# Altium PCB HammerHeadAFE.PcbDoc
Units mil, origin at the board's own origin, x right, y up, seen from the top; angles counter-clockwise.
Board outline 850 x 4000 mil, 6 copper layers (Top Layer, GND, SIGNAL1, SIGNAL2, POWER, Bottom Layer); 89 components, 49 nets, 297 pads, 152 vias.
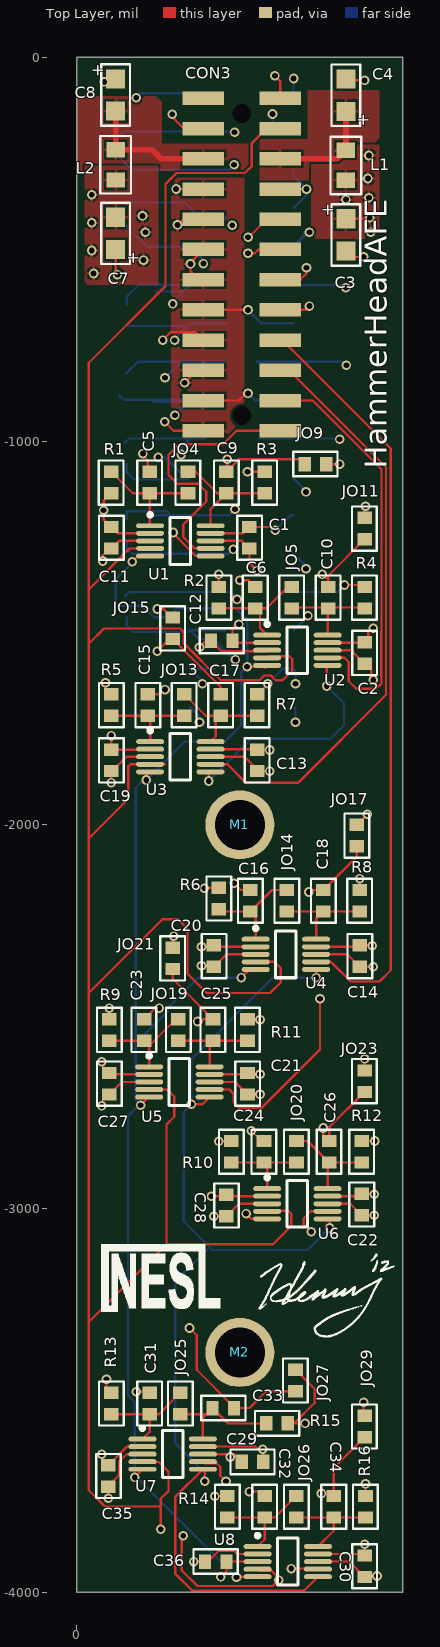
[diagram p0: Top Layer view]
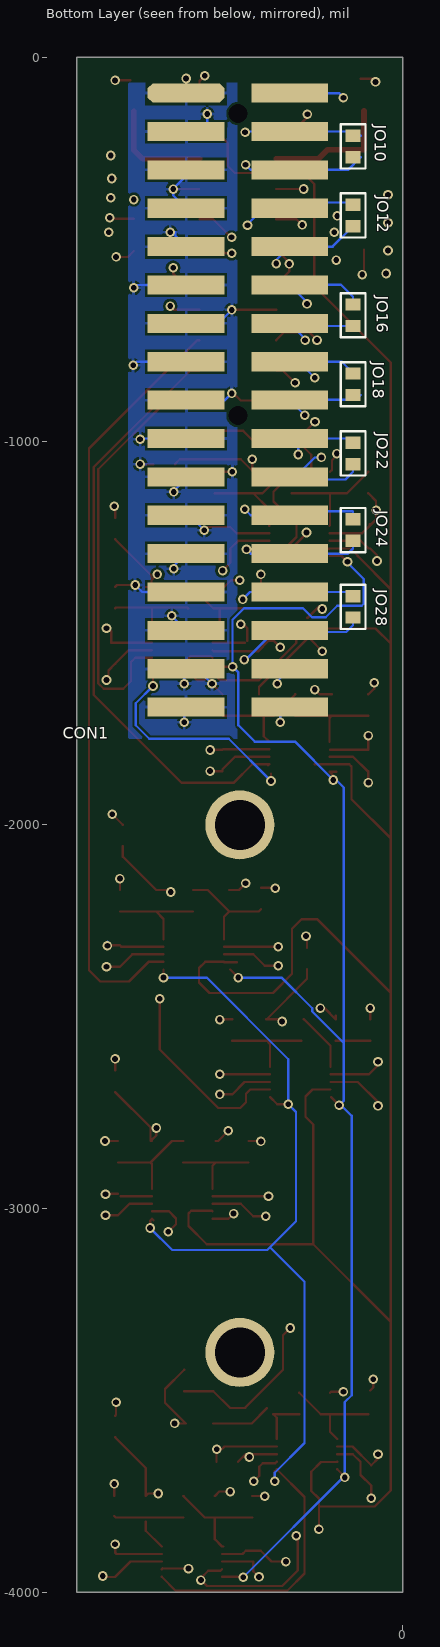
[diagram p1: Bottom Layer view, seen from below]
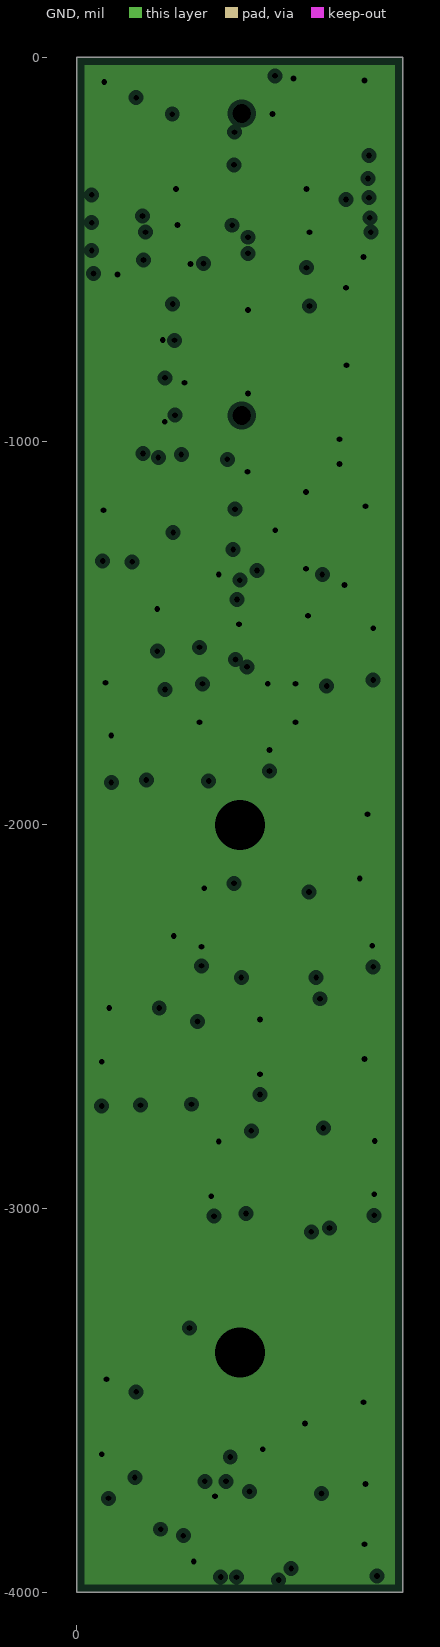
[diagram p2: GND, clearances drawn from the general rule]
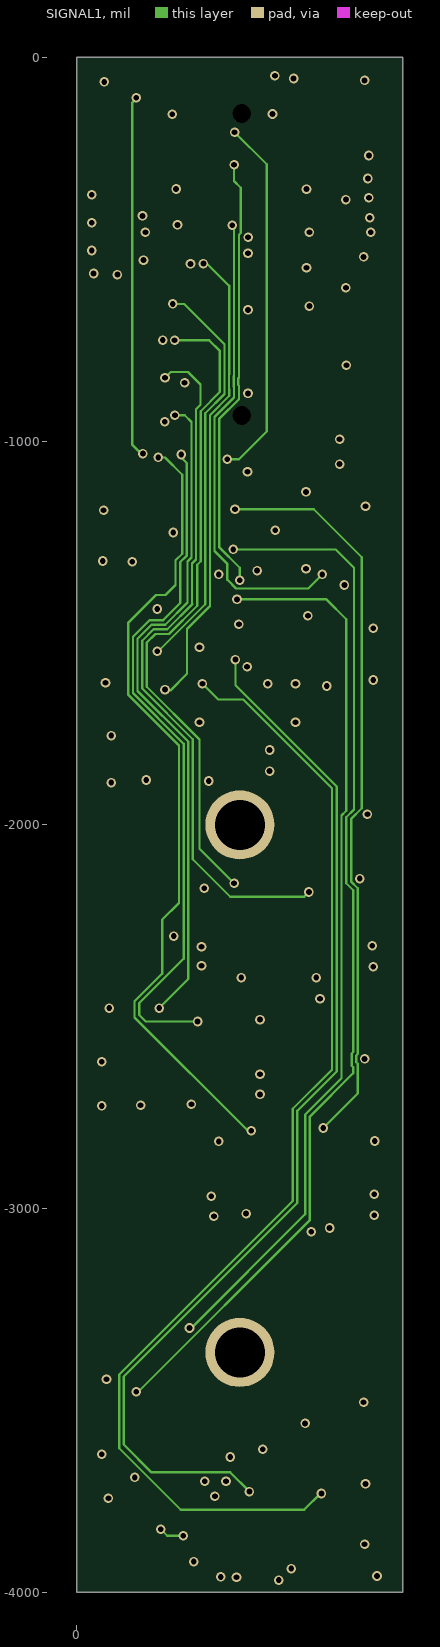
[diagram p3: SIGNAL1]
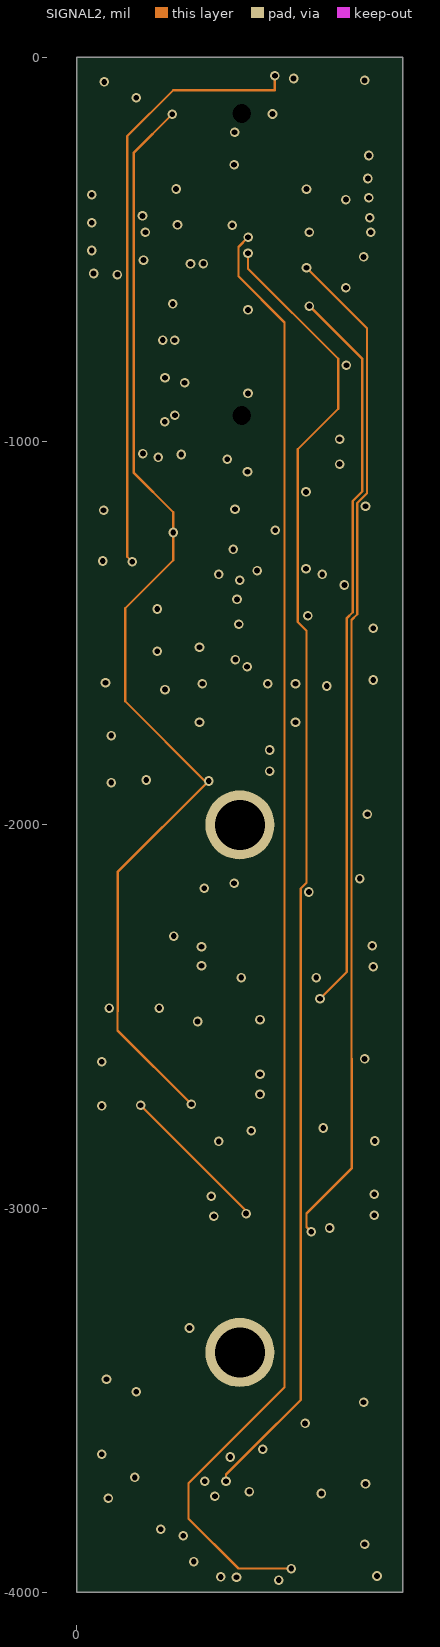
[diagram p4: SIGNAL2]
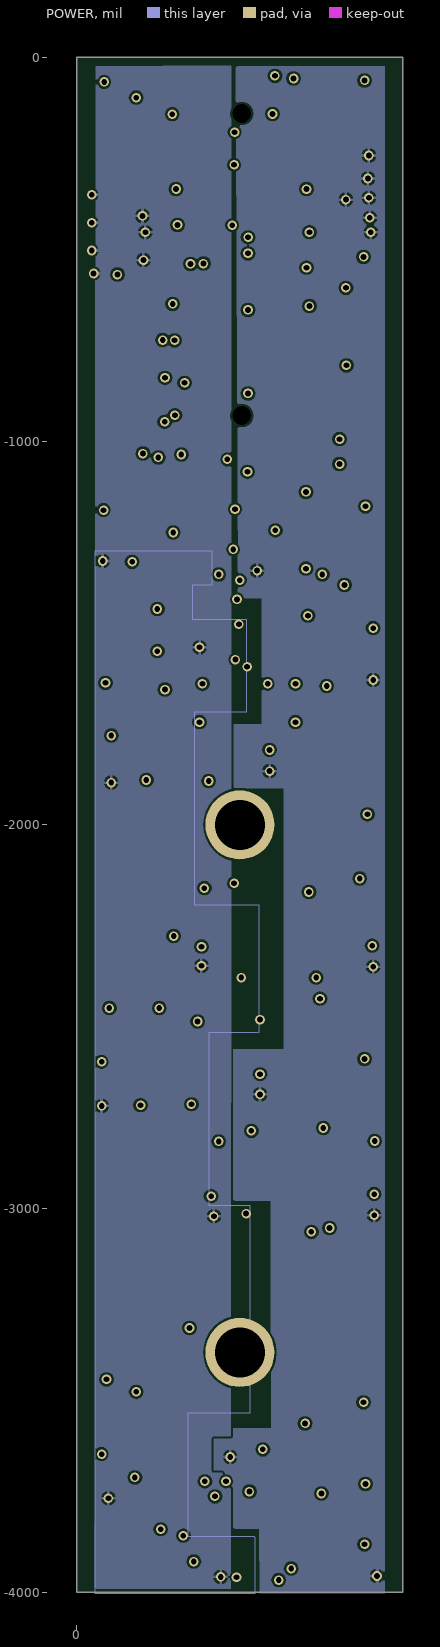
[diagram p5: POWER]

## Layer stack, top to bottom
Top Layer: signal copper 1.4
Dielectric: core 12.6, FR-4, Dk 4.8
GND: plane copper 1.4, net GND
Dielectric: prepreg 12.6, FR-4, Dk 4.8
SIGNAL1: signal copper 1.4
Dielectric: core 12.6, FR-4, Dk 4.8
SIGNAL2: signal copper 1.4
Dielectric: prepreg 12.6, FR-4, Dk 4.8
POWER: signal copper 1.4
Dielectric: core 12.6, FR-4, Dk 4.8
Bottom Layer: signal copper 1.4

## Board outline
0,-4000 0,0 850,0 850,-4000

## Design rules (kind name [scope] priority, off if disabled: settings)
Clearance "Clearance~Sunstone Circuits" [All] p1: gap=6 // Sunstone Circuits Minimum Clearance Rule (MLB~4&6 Layer Designs)
HoleSize "HoleSize~Sunstone Circuits" [All] p1: absolutevalues=TRUE maxlimit=251 minlimit=8 maxpercent=80.000 minpercent=20.000 // Sunstone Circuits Hole Size Rule (MLB~4&6 Layer Designs)
HoleSize Testpoint [All] p2: absolutevalues=TRUE maxlimit=100 minlimit=1 maxpercent=80.000 minpercent=20.000
HoleSize TestPointUsage [All] p3: absolutevalues=TRUE maxlimit=100 minlimit=1 maxpercent=80.000 minpercent=20.000
MinimumAnnularRing "MinimumAnnularRing~Sunstone Circuits" [All] p1: minimumring=7 // Sunstone Circuits Minimum Annular Ring (MLB~4&6 Layer Designs)
PlaneClearance "PlaneClearance~Sunstone Circuits" [All] p1: clearance=12 // Sunstone Circuits Power Plane Clearance Rule (MLB~4&6 Layer Designs)
PlaneConnect "PlaneConnect~Sunstone Circuits" [All] p1: planeconnectstyle=Relief reliefexpansion=10 reliefentries=4 reliefconductorwidth=8 reliefairgap=10 // Sunstone Circuits Power Plane Connect Rule (MLB~4&6 Layer Designs)
PolygonConnect "PolygonConnect~Sunstone Circuits" [All] p1: connectstyle=Relief reliefconductorwidth=8 reliefentries=4 polygonreliefangle="90 Angle" // Sunstone Circuits Polygon Connect Style (MLB~4&6 Layer Designs)
RoomDefinition HammerHeadAFE [InComponentClass('HammerHeadAFE')] p1: confinementstyle=ConfineIn formatcopy=TRUE lockcomponents=FALSE outline 23.84,-4003.2 1513.84,-4003.2 1513.84,179.3 23.84,179.3
RoutingVias "RoutingVias~Sunstone Circuits" [All] p1: holewidth=16 width=30 viastyle="Through Hole" minholewidth=8 minwidth=24 maxholewidth=20 maxwidth=40 // Sunstone Circuits Routing Vias Rule (MLB~4&6 Layer Designs)
ShortCircuit "ShortCircuit~Sunstone Circuits" [All] p1: allowed=FALSE // Sunstone Circuits Short Circuit Rule~Do Not Allow (MLB~4&6 Layer Designs)
SilkscreenOverComponentPads [All] p1: minsilkscreentomaskgap=10
SolderMaskExpansion "SolderMaskExpansion~Sunstone Circuits" [All] p1: expansion=3 // Sunstone Circuits Solder Mask Expansion Rule (MLB~4&6 Layer Designs)
ViasUnderSMD "ViasUnderSMD~Sunstone Circuits" [All] p1: allowed=FALSE // Sunstone Circuits Vias Under SMD~Do Not Allow (MLB~4&6 Layer Designs)
Width "Width~Sunstone Circuits" [All] p1: maxlimit=100 minlimit=6 preferedwidth=10 // Sunstone Circuits Minimum Width Rule (MLB~4&6 Layer Designs)
23 further rules are at their usual default settings.

## Components (designator, comment, footprint, x,y, rotation, side; value= is the part's Value field where it differs from the comment)
C1 "CAP" SM/C_0603 450,-1280 r90 top
C2 "CAP" SM/C_0603 750,-1580 r90 top
C3 "CAP_POL" SM/C_POL_0805 701.34,-420.7 r270 top
C4 "CAP_POL" SM/C_POL_0805 701.34,-140.7 r90 top
C5 "CAP" SM/C_0603 190,-1080 r270 top
C6 "CAP" SM/C_0603 465.38,-1380 r270 top
C7 "CAP_POL" SM/C_POL_0805 101.34,-500.7 r90 top
C8 "CAP_POL" SM/C_POL_0805 101.34,-56 r270 top
C9 "CAP" SM/C_0603 390,-1080 r270 top
C10 "CAP" SM/C_0603 655.12,-1380 r270 top
C11 "CAP" SM/C_0603 90,-1280 r90 top
C12 "CAP" SM/C_0603 350,-1520 r0 top
C13 "CAP" SM/C_0603 470,-1860 r90 top
C14 "CAP" SM/C_0603 737.5,-2370 r90 top
C15 "CAP" SM/C_0603 185.38,-1660 r270 top
C16 "CAP" SM/C_0603 452.62,-2170 r270 top
C17 "CAP" SM/C_0603 375.12,-1660 r270 top
C18 "CAP" SM/C_0603 642.88,-2170 r270 top
C19 "CAP" SM/C_0603 90,-1860 r90 top
C20 "CAP" SM/C_0603 357.5,-2370 r90 top
C21 "CAP" SM/C_0603 445,-2702.5 r90 top
C22 "CAP" SM/C_0603 742.5,-3017.5 r90 top
C23 "CAP" SM/C_0603 175.38,-2506.5 r270 top
C24 "CAP" SM/C_0603 487.88,-2824 r270 top
C25 "CAP" SM/C_0603 355.12,-2506.5 r270 top
C26 "CAP" SM/C_0603 657.62,-2824 r270 top
C27 "CAP" SM/C_0603 85,-2702.5 r90 top
C28 "CAP" SM/C_0603 390,-3020 r90 top
C29 "CAP" SM/C_0603 430,-3660 r0 top
C30 "CAP" SM/C_0603 750,-3960 r90 top
C31 "CAP" SM/C_0603 190,-3480 r270 top
C32 "CAP" SM/C_0603 490,-3749 r270 top
C33 "CAP" SM/C_0603 410,-3520 r180 top
C34 "CAP" SM/C_0603 670,-3749 r270 top
C35 "CAP" SM/C_0603 82.5,-3725 r90 top
C36 "CAP" SM/C_0603 390,-3920 r180 top
CON1 "34 Rectangular Header Pin" "34PIN-RECTANGULAR HEADER-SURFACEMOUNT-100MILSPACING" 565.08,-93.2 r270 bottom
CON3 "24pinHeader" CONN-RECEPT-24PIN 430,-540 r90 top
JO4 "Res" SM/R_0603 290,-1080 r270 top
JO5 "Res" SM/R_0603 559.75,-1436 r90 top
JO9 "Res" SM/R_0603 650,-1060 r180 top
JO10 "Res" SM/R_0603 130,-260 r90 bottom
JO11 "Res" SM/R_0603 750,-1200 r270 top
JO12 "Res" SM/R_0603 130,-440 r90 bottom
JO13 "Res" SM/R_0603 280.25,-1660 r270 top
JO14 "Res" SM/R_0603 547.25,-2226 r90 top
JO15 "Res" SM/R_0603 250,-1460 r270 top
JO16 "Res" SM/R_0603 130,-700 r90 bottom
JO17 "Res" SM/R_0603 730,-2000 r270 top
JO18 "Res" SM/R_0603 130,-880 r90 bottom
JO19 "Res" SM/R_0603 264.75,-2562.5 r90 top
JO20 "Res" SM/R_0603 572.75,-2824 r270 top
JO21 "Res" SM/R_0603 250,-2320 r270 top
JO22 "Res" SM/R_0603 130,-1060 r90 bottom
JO23 "Res" SM/R_0603 750,-2640 r270 top
JO24 "Res" SM/R_0603 130,-1260 r90 bottom
JO25 "Res" SM/R_0603 270,-3536 r90 top
JO26 "Res" SM/R_0603 572.25,-3805 r90 top
JO27 "Res" SM/R_0603 570,-3420 r270 top
JO28 "Res" SM/R_0603 130,-1460 r90 bottom
JO29 "Res" SM/R_0603 750,-3540 r270 top
L1 "CBC3225T4R7MR" SM/L_0805 701.34,-320.7 r90 top
L2 "CBC3225T4R7MR" SM/L_0805 101.34,-240.7 r270 top
M1 "HOLE" MOUNTING_HOLE-125mil#1 630,-1940 r0 top
M2 "HOLE" MOUNTING_HOLE-125mil#2 570,-3300 r0 top
R1 "Res" SM/R_0603 90,-1080 r270 top
R2 "Res" SM/R_0603 370,-1436 r90 top
R3 "Res" SM/R_0603 490,-1080 r270 top
R4 "Res" SM/R_0603 750,-1380 r270 top
R5 "Res" SM/R_0603 90,-1716 r90 top
R6 "Res" SM/R_0603 370,-2220 r90 top
R7 "Res" SM/R_0603 470,-1660 r270 top
R8 "Res" SM/R_0603 737.5,-2170 r270 top
R9 "Res" SM/R_0603 85,-2562.5 r90 top
R10 "Res" SM/R_0603 402.5,-2880 r90 top
R11 "Res" SM/R_0603 445,-2506.5 r270 top
R12 "Res" SM/R_0603 742.5,-2824 r270 top
R13 "Res" SM/R_0603 90,-3536 r90 top
R14 "Res" SM/R_0603 392.5,-3805 r90 top
R15 "Res" SM/R_0603 550,-3560 r180 top
R16 "Res" SM/R_0603 752.5,-3749 r270 top
U1 "AD8253" MSOP-10-LEAD/ANALOGDEVICES 270,-1260 r0 top
U2 "AD8253" MSOP-10-LEAD/ANALOGDEVICES 575,-1545 r0 top
U3 "AD8253" MSOP-10-LEAD/ANALOGDEVICES 270,-1822.5 r0 top
U4 "AD8253" MSOP-10-LEAD/ANALOGDEVICES 545,-2337.5 r0 top
U5 "AD8253" MSOP-10-LEAD/ANALOGDEVICES 267.5,-2670 r0 top
U6 "AD8253" MSOP-10-LEAD/ANALOGDEVICES 575,-2987.5 r0 top
U7 "AD8253" MSOP-10-LEAD/ANALOGDEVICES 250,-3640 r0 top
U8 "AD8253" MSOP-10-LEAD/ANALOGDEVICES 550,-3920 r0 top

## Footprints (in the part's own frame and the unit in brackets; to place one, negate y for a bottom-side part, rotate by r counter-clockwise, add the part's x,y. Pads: shape width x height; smd on the part's side, far side on the other; paste and mask are expansions set on the pad)
"34PIN-RECTANGULAR HEADER-SURFACEMOUNT-100MILSPACING" [mm]
  oct 1.27x5.08 smd: 1(0,0)
  rect 1.27x5.08 smd: 2(0,6.86) 3(2.54,0) 4(2.54,6.86) 5(5.08,0) 6(5.08,6.86) 7(7.62,0) 8(7.62,6.86) 9(10.16,0) 10(10.16,6.86) 11(12.7,0) 12(12.7,6.86) 13(15.24,0) 14(15.24,6.86) 15(17.78,0) 16(17.78,6.86) 17(20.32,0) 18(20.32,6.86) 19(22.86,0) 20(22.86,6.86) 21(25.4,0) 22(25.4,6.86) 23(27.94,0) 24(27.94,6.86) 25(30.48,0) 26(30.48,6.86) 27(33.02,0) 28(33.02,6.86) 29(35.56,0) 30(35.56,6.86) 31(38.1,0) 32(38.1,6.86) 33(40.64,0) 34(40.64,6.86)
CONN-RECEPT-24PIN [mm] "2MM-SMD-DUAL-24POS-PART#:S6010-12-ND"
  rect 0x0 hole 1.25: 0(-10,0) 0(10,0)
  rect 0.89x2.75 smd: 1(-11,-2.54) 2(-11,2.54) 2(-11,2.54) 3(-9,-2.54) 4(-9,2.54) 5(-7,-2.54) 6(-7,2.54) 7(-5,-2.54) 8(-5,2.54) 9(-3,-2.54) 10(-3,2.54) 11(-1,-2.54) 12(-1,2.54) 13(1,-2.54) 14(1,2.54) 15(3,-2.54) 16(3,2.54) 17(5,-2.54) 18(5,2.54) 19(7,-2.54) 20(7,2.54) 21(9,-2.54) 22(9,2.54) 23(11,-2.54) 24(11,2.54)
MOUNTING_HOLE-125mil#1 [mil]
  round 180 hole 130: 0(-205,-60)
MOUNTING_HOLE-125mil#2 [mil]
  round 180 hole 130: 0(-145,-75)
MSOP-10-LEAD/ANALOGDEVICES [mm] "AD8253"
  oval 1.85x0.33 smd: 1(-2,1) 2(-2,0.5) 3(-2,0) 4(-2,-0.5) 5(-2,-1) 6(2,-1) 7(2,-0.5) 8(2,0) 9(2,0.5) 10(2,1)
  silkscreen extent -2.12,-1.55 0.67,1.85, body extent -1.55,-1.55 1.55,1.55, height 1.1
SM/C_0603 [mil]
  rect 32x38 smd: 1(0,0) 2(56,0)
  silkscreen extent -30,-32 86,32
SM/C_POL_0805 [mil]
  rect 50x50 smd: 1(0,0) 2(84,0)
  silkscreen extent -38,-38 122,38
SM/L_0805 [mil]
  rect 40x48 smd: 1(0,0) 2(79,0)
  silkscreen extent -36,-40 114,40
SM/R_0603 [mil]
  rect 32x38 smd: 1(0,0) 2(56,0)
  silkscreen extent -30,-33 86,32

## Part data
C1 C2 C11 C12 C13 C14 C19 C20 C21 C22 C27 C28 C29 C30 C35 C36: "1uF"
C3 C4 C7 C8: "CAP"
C5 C6 C9 C10 C15 C16 C17 C18 C23 C24 C25 C26 C31 C32 C33 C34: "100nF"
CON1: library part 34pinHeader
JO4 JO5 JO13 JO14 JO19 JO20 JO25 JO26: "Resistor 1M"
JO9 JO10 JO11 JO12 JO15 JO16 JO17 JO18 JO21 JO22 JO23 JO24 JO27 JO28 JO29 R1 R2 R3 R4 R5 R6 R7 R8 R9 R10 R11 R12 R13 R14 R15 R16: "Resistor"
L1 L2: library part Inductor
M1 M2: library part MountingHole

## Via types
v1: diameter 25, hole 15, Top Layer to Bottom Layer, tented both sides, 152 vias

## Nets (pads, with @x,y where several pads share a name; then routed paths per layer and width w, separated by ;. In a path a pad name is that pad's centre, name@x,y a point inside that pad or via, vN(x,y) a via of type N, cw(c..) or ccw(c..) an arc to the next point about the centre after c; other vN are vias at no path point)
+10V: C1.1 C2.1 C3.1 C13.1 C14.1 C21.1 C22.1 C29.1 C30.1 L1.1 U1.8 U2.8 U3.8 U4.8 U5.8 U6.8 U7.8 U8.8 | length 1346.8
  Top Layer w6: U7.8 410,-3640 C29.1 417.5,-3647.5 v1(400,-3647.5) ; U5.8 412.5,-2670 C21.1 v1(477.5,-2702.5) ; U3.8 437.5,-1822.5 470,-1855 C13.1 v1(502.5,-1860) ; U1.8 430,-1260 C1.1 450,-1317.5 v1(470,-1337.5) ; U4.8 705,-2337.5 C14.1 v1(772.5,-2370) ; U8.8 710,-3920 C30.1 780,-3960 v1(782.5,-3957.5) ; U6.8 712.5,-2987.5 C22.1 v1(775,-3017.5) ; U2.8 715,-1545 C2.1 767.5,-1597.5 767.5,-1610 772.5,-1615 v1(772.5,-1622.5) ; C3.1 763.84,-420.7 v1(763.84,-418.2) ; v1@746.34,-315.7 v1(758.84,-315.7)
  Bottom Layer w6: v1@475,-2702.5 v1(477.5,-2702.5)
  other v1: 766.34,-455.7 701.34,-370.7 761.34,-365.7 761.34,-255.7
+10VIN: C4.1 CON3.19 L1.2 | length 281.7
  Top Layer w15: CON3.19 678.63,-264.41 L1.2 C4.1
-10V: C7.2 C11.1 C12.1 C19.1 C20.1 C27.1 C28.1 C35.1 C36.1 L2.2 U1.3 U2.3 U3.3 U4.3 U5.3 U6.3 U7.3 U8.3 | length 1270.5
  Top Layer w6: v1(65,-2732.5) 65,-2722.5 117.5,-2670 U5.3 ; v1(67.5,-1312.5) 67.5,-1297.5 85,-1280 C11.1 110,-1260 U1.3 ; v1(82.5,-3755) C35.1 82.5,-3722 110.5,-3694 110.5,-3660 130.5,-3640 U7.3 ; v1(90,-1890) C19.1 92.5,-1860 130,-1822.5 U3.3 ; v1(320,-1537.5) 337.5,-1520 C12.1 378,-1548 493.26,-1548 U2.3 ; v1(325,-2367.5) 360,-2367.5 390,-2337.5 U4.3 ; v1(357.5,-3020) C28.1 422.5,-2987.5 U6.3 ; v1(375,-3960) 390,-3945 C36.1 U8.3
  Bottom Layer w6: v1@77.5,-3755 v1(82.5,-3755) ; v1(320,-1537.5) v1@322.5,-1540
  other v1: 43.84,-563.2 173.84,-528.2 38.84,-503.2 178.84,-455.7 38.84,-430.7 171.34,-413.2 38.84,-358.2
-10VIN: C8.2 CON3.20 L2.1 | length 339.2
  Top Layer w15: C8.2 L2.1 196.34,-240.7 220.04,-264.41 CON3.20
A0: CON3.21 U1.4 U2.4 U3.4 U4.4 U5.4 U6.4 U7.4 U8.4 | length 8211.4
  Top Layer w6: 118,-1299.73 31.34,-1386.39 ; 118,-1299.04 137.35,-1279.68 U1.4 192.28,-1280.7 U1.4@224.65,-1280.7 ; U7.4 172.28,-3660.7 213.84,-3660.7 238.84,-3685.7 238.84,-3735.7 218.84,-3755.7 218.84,-3775.7 ; U5.4 235.32,-2689.68 253.84,-2708.2 253.84,-2760.7 233.84,-2780.7 233.84,-3093.2 ; v1(218.84,-3835.7) 218.84,-3775.7 ; 230,-1842.18 U3.4 139.85,-1842.18 133.84,-1848.2 133.84,-1933.2 31.34,-2035.7 ; v1(277.84,-3852.61) 273.84,-3856.61 273.84,-3943.2 314.34,-3983.7 510.84,-3983.7 v1(526.34,-3968.2) 526.34,-3962.61 507.6,-3943.87 475.45,-3943.87 U8.4 ; U4.4@433.09,-2358.2 465.24,-2358.2 U4.4 515.32,-2357.18 531.34,-2373.2 531.34,-2410.7 503.84,-2438.2 338.84,-2438.2 288.84,-2388.2 288.84,-2270.7 263.84,-2245.7 223.84,-2245.7 31.34,-2438.2 ; U6.4 497.74,-3005.7 551.34,-3005.7 558.84,-3013.2 558.84,-3045.7 511.34,-3093.2 233.84,-3093.2 ; U2.4 500.24,-1560.7 553.84,-1560.7 561.34,-1568.2 561.34,-1598.2 536.34,-1623.2 518.61,-1623.2 506.41,-1611 488.59,-1611 476.39,-1623.2 375.3,-1623.2 278,-1525.91 278,-1496.27 269.93,-1488.2 71.34,-1488.2 31.34,-1528.2 ; CON3.21 493.87,-185.67 456.34,-223.2 456.34,-283.2 438.04,-301.5 260.14,-301.5 231.34,-330.31 231.34,-595.7 31.34,-795.7 31.34,-1386.39 ; 31.34,-3295.7 31.34,-3734.24 73.59,-3776.5 218.04,-3776.5 218.84,-3775.7 ; 31.34,-3295.7 233.84,-3093.2 ; 31.34,-3295.7 31.34,-2438.2 ; 31.34,-2438.2 31.34,-2035.7 ; 31.34,-2035.7 31.34,-1528.2 ; 31.34,-1528.2 31.34,-1386.39
  SIGNAL1 w6: v1(218.84,-3835.7) 235.74,-3852.61 v1(277.84,-3852.61)
A1: CON3.23 U1.5 U2.5 U3.5 U4.5 U5.5 U6.5 U7.5 U8.5 | length 6107.9
  Top Layer w6: v1(144.43,-1314.7) 159.76,-1299.37 U1.5 ; v1(151.34,-3700.7) 151.34,-3699.29 U7.5 ; v1(166.34,-2730.7) U5.5@187.67,-2709.37 ; U3.5@173.13,-1861.87 U3.5 181.34,-1871.79 v1(181.34,-1883.2) ; v1(416.34,-3960.7) 417.67,-3959.37 U8.5 ; v1(428.84,-2398.2) U4.5@450.17,-2376.87 ; v1(441.34,-3013.2) 455,-3026.87 U6.5 U6.5@475.63,-3026.87 ; v1(443.84,-1588.2) 486.83,-1588.2 489.63,-1591 U2.5 ; v1(516.34,-48.2) 530,-61.87 CON3.23
  SIGNAL2 w6: v1(144.43,-1314.7) 131.34,-1301.61 131.34,-1111.17 131.84,-1110.67 131.84,-205.2 251.34,-85.7 516.34,-85.7 v1(516.34,-48.2) ; v1(166.34,-2730.7) 441.34,-3005.7 v1(441.34,-3013.2)
  Bottom Layer w6: v1(144.43,-1314.7) 146.17,-1314.7 146.34,-1314.87 102,-1359.2 102,-1423.73 107.27,-1429 171.09,-1429 201.09,-1459 237.04,-1459 260.34,-1435.7 413.84,-1435.7 444,-1465.87 444,-1588.04 v1(443.84,-1588.2) 428.84,-1603.2 428.84,-1740.7 386.34,-1783.2 281.34,-1783.2 v1(181.34,-1883.2) 173.84,-1883.2 153.84,-1903.2 153.84,-2718.2 v1(166.34,-2730.7) 161.34,-2730.7 133.5,-2758.54 133.5,-3486.41 151.34,-3504.24 v1(151.34,-3700.7) 156.34,-3700.7 v1(416.34,-3960.7) ; 154.27,-2568.64 236.5,-2486.41 236.5,-2478.04 316.34,-2398.2 v1(428.84,-2398.2)
BRDCS: CON3.24
ELECTRODE1: C5.1 CON1.2 | length 1160.8
  Top Layer w6: v1(172.5,-1032.5) 172.5,-1037.5 185,-1050 185,-1075 C5.1
  SIGNAL1 w6: v1@162.5,-100 145,-117.5 145,-1010 172.5,-1037.5 v1(172.5,-1032.5)
  Bottom Layer w6: v1(155,-105) 166.8,-93.2 CON1.2
ELECTRODE2: C9.1 CON1.4 JO9.2 JO10.2 | length 1593.2
  Top Layer w6: C9.1 C9.1@392.5,-1077.5 ; v1(392.5,-1047.5) C9.1@392.5,-1077.5 ; JO9.2 581.5,-1047.5 422.5,-1047.5 C9.1@392.5,-1077.5
  SIGNAL1 w6: v1(392.5,-1047.5) 422.5,-1047.5 495,-975 495,-278.6 v1(411.4,-195)
  Bottom Layer w6: 110,-204 120.8,-193.2 CON1.4 ; CON1.4@211.8,-193.2 CON1.4 ; v1(411.4,-195) 413.2,-193.2 CON1.4
ELECTRODE3: C6.1 CON1.6 JO10.1 | length 1518.5
  Top Layer w6: v1(425,-1362.5) 447.88,-1362.5 C6.1 C6.1@480,-1380
  SIGNAL1 w6: v1(410,-280) 410,-322.09 427.5,-339.59 427.5,-457.5 422.8,-462.2 422.8,-834.06 420.88,-835.98 420.88,-853.79 422.8,-855.7 422.8,-890.91 ; 422.5,-890.91 371,-942.41 371,-1276 425,-1330 v1(425,-1362.5)
  Bottom Layer w6: 110,-260 143.2,-293.2 CON1.6 396.8,-293.2 v1(410,-280)
ELECTRODE4: C10.1 CON1.8 JO11.2 JO12.2 | length 1759.4
  Top Layer w6: v1(640,-1347.5) 655.12,-1362.62 C10.1 ; C10.1@655.12,-1374.88 C10.1 ; C10.1@670,-1380 C10.1 ; JO11.2 655.12,-1350.88 C10.1
  SIGNAL1 w6: v1(405,-437.5) 410,-442.5 410,-829.89 408.88,-831.01 408.88,-858.76 410,-859.88 410,-886.44 359,-937.44 359,-1286.5 392.5,-1320 392.5,-1361.5 415,-1384 603.5,-1384 v1(640,-1347.5)
  Bottom Layer w6: JO12.2 135.8,-378.2 280,-378.2 309.3,-407.5 377.5,-407.5 405,-435 v1(405,-437.5)
ELECTRODE5: C15.1 CON1.10 JO12.1 | length 1531.3
  Top Layer w6: C15.1 217.5,-1660 v1(230,-1647.5)
  SIGNAL1 w6: v1(230,-1647.5) 232.5,-1650 243.95,-1650 287.5,-1606.45 287.5,-1489.47 347,-1429.97 347,-932.47 397.5,-881.97 397.5,-864.35 396.88,-863.73 396.88,-826.04 397.5,-825.42 397.5,-595 396.8,-595 332.5,-530.7 330,-533.2 v1(330,-537.5)
  Bottom Layer w6: JO12.1 183.2,-493.2 CON1.10 332.5,-530.7 330,-533.2 v1(330,-537.5)
ELECTRODE6: C17.1 CON1.12 JO15.2 JO16.2 | length 1700.9
  Top Layer w6: v1(210,-1547.5) 241.5,-1516 JO15.2 375.12,-1641.12 C17.1
  SIGNAL1 w6: v1(210,-1547.5) 212.5,-1547.5 335,-1425 335,-927.5 385,-877.5 385,-868.82 384.88,-868.7 384.88,-821.07 385,-820.95 385,-747.5 280,-642.5 v1(250,-642.5)
  Bottom Layer w6: JO16.2 130,-624 161.5,-592.5 251.8,-592.5 CON1.12@252.5,-593.2 ; CON1.12@205,-610 278.2,-610 CON1.12 ; CON1.12@216.3,-593.2 CON1.12@252.5,-593.2 ; v1(250,-642.5) 250,-638.2 CON1.12 ; CON1.12@252.5,-593.2 CON1.12
ELECTRODE7: C16.1 CON1.14 JO16.1 | length 2085.1
  Top Layer w6: v1(410,-2152.5) 427.5,-2170 C16.1
  SIGNAL1 w6: v1(255,-737.5) 345.5,-737.5 373,-765 373,-815.98 372.88,-816.1 372.88,-872.12 323,-922 323,-1313.18 313.84,-1322.35 313.84,-1429.19 240.53,-1502.5 205,-1502.5 182.5,-1525 182.5,-1640 320,-1777.5 320,-2062.5 v1(410,-2152.5)
  Bottom Layer w6: JO16.1 288.2,-700 CON1.14 ; v1(255,-737.5) 255,-733.2 CON1.14 ; CON1.14@390.7,-693.2 CON1.14
ELECTRODE8: C18.1 CON1.16 JO17.2 JO18.2 | length 2355.1
  Top Layer w6: v1(605,-2175) 610,-2170 C18.1 ; C18.1@642.5,-2170 C18.1 ; JO17.2 730,-2082.88 C18.1
  SIGNAL1 w6: v1(230,-835) 245,-820 290,-820 322.5,-852.5 322.5,-905.53 311,-917.03 311,-1308.21 300.5,-1318.71 300.5,-1423.73 ; 301.41,-1424.65 235.56,-1490.5 200.03,-1490.5 170.5,-1520.03 170.5,-1644.97 302.5,-1776.97 302.5,-2090 400,-2187.5 592.5,-2187.5 v1(605,-2175)
  Bottom Layer w6: JO18.2@128.5,-824 159.3,-793.2 CON1.16@385.7,-793.2 ; v1(230,-835) CON1.16@271.8,-793.2
ELECTRODE9: C23.1 CON1.18 JO18.1 | length 2220.4
  Top Layer w6: C23.1@175.38,-2497.88 C23.1 204.38,-2477.5 v1(215,-2477.5)
  SIGNAL1 w6: v1(215,-2477.5) 290.5,-2402 290.5,-1783 158.5,-1651 158.5,-1515.06 195.06,-1478.5 230.59,-1478.5 288.5,-1420.59 288.5,-1313.74 299,-1303.24 299,-950 281.5,-932.5 v1(255.7,-932.5)
  Bottom Layer w6: 110,-880 122.5,-892.5 285.7,-892.5 CON1.18@290.7,-897.5 ; CON1.18@200,-897.5 CON1.18@290.7,-897.5 ; v1(255.7,-932.5) CON1.18 ; CON1.18@371.8,-893.2 CON1.18 ; CON1.18@290.7,-897.5 CON1.18
ELECTRODE10: C25.1 CON1.20 JO21.2 JO22.2 | length 2321.4
  Top Layer w6: JO21.2 250,-2401.38 C25.1 ; v1(315,-2512.5) 321,-2506.5 C25.1 ; C25.1@356.41,-2506.5 C25.1
  SIGNAL1 w6: v1(272.5,-1035) 272.5,-1043 287,-1057.5 287,-1298.27 270,-1315.27 270,-1422.12 225.62,-1466.5 190.09,-1466.5 146.5,-1510.09 146.5,-1656.5 278.5,-1788.5 278.5,-2349 162.5,-2465 162.5,-2495 180,-2512.5 v1(315,-2512.5)
  Bottom Layer w6: JO22.2@126,-1004 136.8,-993.2 CON1.20@250,-993.2 ; CON1.20@216.8,-993.2 CON1.20@250,-993.2 ; v1(272.5,-1035) 272.5,-1015.7 CON1.20 ; CON1.20@333.2,-993.2 CON1.20 ; CON1.20@250,-993.2 CON1.20
ELECTRODE11: C24.1 CON1.22 JO22.1 | length 2441.5
  Top Layer w6: v1(455,-2797.5) 481.5,-2824 C24.1
  SIGNAL1 w6: v1(212.5,-1042.5) 230,-1042.5 275,-1087.5 275,-1293.3 257.5,-1310.8 257.5,-1375 231.32,-1401.18 206.32,-1401.18 134.5,-1473 134.5,-1661.47 266.5,-1793.47 266.5,-2203.5 222.5,-2247.5 222.5,-2388.03 150.5,-2460.03 150.5,-2501.97 446.03,-2797.5 v1(455,-2797.5)
  Bottom Layer w6: JO22.1 130,-1080 150,-1100 288.2,-1100 CON1.22 280.7,-1093.2 230,-1042.5 v1(212.5,-1042.5)
ELECTRODE12: C26.1 CON1.24 JO23.2 JO24.2 | length 2532.1
  Top Layer w6: v1(642.5,-2790) 642.5,-2808.88 C26.1 ; C26.1@654,-2824 C26.1 ; JO23.2 657.62,-2788.38 C26.1
  SIGNAL1 w6: v1(412.5,-1177.5) 617.5,-1177.5 742.5,-1302.5 742.5,-1957.09 715,-1984.59 715,-2147.91 732.5,-2165.41 732.5,-2597.09 728.5,-2601.09 728.5,-2618.91 732.5,-2622.91 732.5,-2700 v1(642.5,-2790)
  Bottom Layer w6: JO24.2 130,-1184 131.5,-1182.5 234.3,-1182.5 CON1.24@245,-1193.2 ; CON1.24@203.8,-1193.2 CON1.24@245,-1193.2 ; CON1.24@256.8,-1193.2 CON1.24 ; v1(412.5,-1177.5) 396.8,-1193.2 CON1.24 ; CON1.24@245,-1193.2 CON1.24
ELECTRODE13: C31.1 CON1.26 JO24.1 | length 3125.2
  Top Layer w6: v1(155,-3477.5) 187.5,-3477.5 C31.1
  SIGNAL1 w6: v1(155,-3477.5) 160,-3477.5 607.5,-3030 607.5,-2760 720.5,-2647 720.5,-2631.88 716.5,-2627.88 716.5,-2596.12 720.5,-2592.12 720.5,-2170.38 702.5,-2152.38 702.5,-1980.12 722.5,-1960.12 722.5,-1330 674.8,-1282.3 v1(407.7,-1282.3)
  Bottom Layer w6: JO24.1 130,-1280 143.2,-1293.2 CON1.26 ; CON1.26@251.8,-1293.2 CON1.26 ; v1(407.7,-1282.3) 396.8,-1293.2 CON1.26
ELECTRODE14: C33.1 CON1.28 JO27.2 JO28.2 | length 3147.8
  Top Layer w6: v1(293.75,-3311.25) 312.5,-3330 312.5,-3420 410,-3517.5 C33.1 450,-3520 494,-3476 JO27.2
  SIGNAL1 w6: v1(293.75,-3311.25) 298.75,-3311.25 595.5,-3014.5 595.5,-2755.03 690,-2660.53 690,-1975.65 702.5,-1963.15 702.5,-1464.5 650.5,-1412.5 v1(417.5,-1412.5)
  Bottom Layer w6: JO28.2@126,-1404 136.8,-1393.2 CON1.28 ; CON1.28@378.2,-1393.2 CON1.28 ; v1(417.5,-1412.5) 398.2,-1393.2 CON1.28
ELECTRODE15: C32.1 CON1.30 JO28.1 | length 3294
  Top Layer w6: v1(450,-3737.5) 478.5,-3737.5 C32.1
  SIGNAL1 w6: v1(413.5,-1569.5) 413.5,-1636 677.5,-1900 677.5,-2642.5 575,-2745 575,-2985 122.5,-3437.5 122.5,-3615 195,-3687.5 400,-3687.5 v1(450,-3737.5)
  Bottom Layer w6: JO28.1 130,-1480 147.5,-1497.5 290.7,-1497.5 CON1.30 ; CON1.30@300.8,-1499 CON1.30 ; CON1.30@338.2,-1493.2 CON1.30 ; CON1.30@385.7,-1493.2 CON1.30 ; v1(413.5,-1569.5) 409.03,-1569.5 355.53,-1516 317.8,-1516 CON1.30
ELECTRODE16: C34.1 CON1.32 JO29.2 | length 3369.4
  Top Layer w6: v1(637.5,-3742.5) 663.5,-3742.5 C34.1 670,-3676 JO29.2
  SIGNAL1 w6: v1(327.5,-1632.5) 368.49,-1673.49 434.01,-1673.49 665,-1904.47 665,-2638.03 563,-2740.03 563,-2980.03 110.5,-3432.53 110.5,-3624.47 271.03,-3785 592.5,-3785 635,-3742.5 v1(637.5,-3742.5)
  Bottom Layer w6: CON1.32@310,-1608.2 CON1.32 ; v1(327.5,-1632.5) 327.5,-1625.7 CON1.32 ; CON1.32@358.2,-1593.2 CON1.32
GND: C1.2 C2.2 C3.2 C4.2 C7.1 C8.1 C11.2 C12.2 C13.2 C14.2 C19.2 C20.2 C21.2 C22.2 C27.2 C28.2 C29.2 C30.2 C35.2 C36.2 CON1.1 CON1.3 CON1.5 CON1.7 CON1.9 CON1.11 CON1.13 CON1.15 CON1.17 CON1.19 CON1.21 CON1.23 CON1.25 CON1.27 CON1.29 CON1.31 CON1.33 CON1.34 CON3.2 CON3.4 CON3.6 CON3.8 CON3.10 CON3.12 CON3.14 CON3.16 CON3.17 CON3.18 JO9.1 JO11.1 JO15.1 JO17.1 JO21.1 JO23.1 JO27.1 JO29.1 M1.0 M2.0 R1.2 R2.2 R3.1 R4.1 R5.2 R6.2 R7.1 R8.1 R9.2 R10.2 R11.1 R12.1 R13.2 R14.2 R15.1 R16.1 U1.2 U1.9 U2.2 U2.9 U3.2 U3.9 U4.2 U4.9 U5.2 U5.9 U6.2 U6.9 U7.2 U7.9 U8.2 U8.9 | length 6291.7
  Top Layer w6: v1(65,-3640) 65,-3651.5 C35.2 131.19,-3620.31 U7.2 ; v1(65,-2617.5) 65,-2626.5 88.81,-2650.31 U5.2 ; v1(71.5,-64) 71.5,-56 C8.1@110,-56 ; v1(75,-1630) 75,-1645 R5.2 ; v1(77.5,-3445) 77.5,-3466.5 R13.2@85,-3474 ; R9.2 v1(85,-2477.5) ; C11.2@86.25,-1216.12 C11.2 ; v1(90,-1767.5) C19.2 U3.2@190.07,-1804 ; R1.2 70,-1156 v1(70,-1180) 70,-1204 C11.2 ; C7.1 101.34,-561.34 v1@110,-570 ; U1.2 106.31,-1240.31 C11.2 ; v1(210,-1437.5) 217.5,-1430 247.5,-1460 JO15.1 ; v1(224,-736.7) 244.7,-716 309.15,-716 CON3.8 ; v1(229.06,-949.7) 252.43,-973.07 CON3.2@330,-973.07 ; JO21.1 250,-2292.5 v1(252.5,-2290) ; v1(258.89,-343.15) CON3.18 ; v1(262.65,-436.7) 277.46,-421.89 CON3.16 ; v1(281.11,-848.2) 313.72,-815.59 CON3.6 ; v1(305,-3920) C36.2 342.27,-3920 370.27,-3892 409.73,-3892 418.04,-3900.31 U8.2 ; v1(325,-2317.5) 325.31,-2317.81 U4.2 ; U7.9 465.31,-3620.31 v1@478.75,-3633.75 ; CON3.4 422.71,-894.33 441.34,-875.7 v1(446.34,-875.7) ; CON3.10 446.24,-658.11 v1(446.34,-658.2) ; CON3.12 317.5,-579.37 296.34,-558.2 v1(296.34,-538.2) 296.34,-534.29 CON3.14 ; v1(332.5,-2165) 333.5,-2164 R6.2 ; U5.9 441.19,-2650.31 441.5,-2650 v1(477.5,-2650) ; U3.9 C13.2@468.81,-1802.81 ; U1.9 433.69,-1240.31 C1.2 509,-1224 v1(517.5,-1232.5) ; v1(350.31,-2967.81) U6.2 ; v1(360,-3750) 361,-3749 R14.2 ; v1(370,-2825) 371,-2824 R10.2 ; R2.2 v1(370,-1347.5) ; C12.2 406,-1488.5 405,-1487.5 v1@415,-1477.5 ; C12.2@411.31,-1525.31 U2.2 ; R11.1 476.5,-2506.5 v1(477.5,-2507.5) ; v1(445,-1080) R3.1 ; C13.2 501.5,-1804 v1(502.5,-1805) ; R7.1 v1(497.5,-1632.5) ; v1(485,-3627.5) 486,-3628.5 C29.2 ; CON3.17 v1@598.78,-343.15 ; JO27.1 620,-3470 620,-3506 566,-3560 v1(595,-3560) ; U4.9 733.69,-2317.81 C14.2 769,-2314 v1(770,-2315) ; U8.9 746.31,-3900.31 750,-3896.63 v1(750,-3875) ; JO9.1 v1(685,-1060) ; U6.9 C22.2@736.19,-2967.81 ; U2.9 760,-1525.31 760,-1495 770,-1495 772.5,-1492.5 v1(772.5,-1487.5) ; v1(697.5,-1375) 745,-1375 R4.1 ; v1@698.84,-798.61 v1(702.84,-802.61) ; C3.2 716.63,-520 v1(747.5,-520) ; C4.2@710,-60 v1(750,-60) ; JO17.1 v1(757.5,-1972.5) ; R8.1 v1(737.5,-2140) ; C22.2 774,-2961.5 v1(775,-2962.5) ; R12.1 v1(776.5,-2824) ; v1(747.5,-3505) 747.5,-3537.5 JO29.1 ; JO23.1 v1(750,-2610) ; JO11.1 750,-1172.5 v1(752.5,-1170) ; R16.1 v1(752.5,-3717.5)
  Bottom Layer w6: CON1.34 320,-1718.2 v1(320,-1732.5) ; v1(325,-2317.5) v1@325,-2315 ; v1(446.34,-875.7) 463.84,-893.2 CON1.17 ; v1(446.34,-658.2) 481.34,-693.2 CON1.13 CON1.13@493.08,-693.2 ; CON1.15@469.3,-793.2 CON1.15 693.43,-793.2 v1(702.84,-802.61) ; CON1.19@475.7,-993.2 CON1.19 683.2,-993.2 v1(685,-995) ; v1@482.5,-3630 v1(485,-3627.5) ; v1@500,-1635 v1(497.5,-1632.5) 536.8,-1593.2 CON1.31@553.91,-1593.2 ; CON1.3@510,-179.84 v1(510,-147.5) ; v1(517.5,-1232.5) 556.8,-1193.2 CON1.23 ; v1(565,-55) 565.08,-55.08 CON1.1 ; CON1.33 570,-1698.12 v1(570,-1732.5) ; CON1.31 570,-1598.12 v1(570,-1632.5) ; CON1.29 v1@602.5,-1455.78 ; CON1.27 679.3,-1393.2 v1(697.5,-1375) ; CON1.25 597.5,-1325.62 v1(597.5,-1332.5) ; CON1.21 565.08,-1097.58 597.5,-1130 v1(597.5,-1132.5) ; CON1.11 693.84,-593.2 v1(701.34,-600.7) ; CON1.9 592.5,-465.78 592.5,-455 596.34,-458.84 596.34,-460.7 606.34,-460.7 v1(606.34,-455.7) ; CON1.7 598.84,-359.44 v1(598.84,-343.2) 565.08,-309.44 CON1.5 ; v1@592.5,-3557.5 v1(595,-3560) ; v1(770,-2315) v1@770,-2305
  other v1: 422.5,-1477.5 602.5,-1455 106,-566
NetC5_2: C5.2 JO4.2 R1.1 U1.1 | length 308.3
  Top Layer w6: R1.1 146,-1136 C5.2 ; U1.1 190,-1219.37 C5.2 ; JO4.2 C5.2
NetC6_2: C6.2 JO5.2 R2.1 U2.1 | length 290.3
  Top Layer w6: R2.1 C6.2 C6.2@477.5,-1436 ; U2.1 477.5,-1486.87 C6.2@477.5,-1436 ; JO5.2 550,-1380 494,-1436 C6.2@477.5,-1436
NetC9_2: C9.2 JO4.1 R3.2 U1.10 | length 325.9
  Top Layer w6: JO4.1 310,-1080 366,-1136 C9.2 ; U1.10 348.74,-1177.26 C9.2 ; C9.2@391,-1136 C9.2 ; R3.2 C9.2
NetC10_2: C10.2 JO5.1 R4.2 U2.10 | length 260.6
  Top Layer w6: JO5.1 562.25,-1433.5 747.5,-1433.5 R4.2 ; U2.10 C10.2@653.74,-1437.38
NetC15_2: C15.2 JO13.2 R5.1 U3.1 | length 259.8
  Top Layer w6: R5.1 C15.2 ; U3.1 191.26,-1721.88 C15.2 ; JO13.2 C15.2
NetC16_2: C16.2 JO14.2 R6.1 U4.1 | length 280.7
  Top Layer w6: R6.1 376,-2226 C16.2 ; U4.1 466.26,-2239.63 C16.2 ; JO14.2 508.62,-2170 C16.2
NetC17_2: C17.2 JO13.1 R7.2 U3.10 | length 285.8
  Top Layer w6: JO13.1 336.25,-1716 C17.2@362.5,-1716 ; U3.10 362.5,-1769.37 C17.2@362.5,-1716 ; R7.2 C17.2 C17.2@362.5,-1716
NetC18_2: C18.2 JO14.1 R8.2 U4.10 | length 270.3
  Top Layer w6: JO14.1 C18.2 ; U4.10 623.74,-2245.13 C18.2 ; R8.2 C18.2
NetC23_2: C23.2 JO19.2 R9.1 U5.1 | length 243.2
  Top Layer w6: R9.1 C23.2 ; U5.1 188.76,-2575.88 JO19.2@258.14,-2506.5
NetC24_2: C24.2 JO20.2 R10.1 U6.1 | length 241.9
  Top Layer w6: R10.1 C24.2 ; U6.1 496.26,-2888.38 C24.2 ; JO20.2 C24.2
NetC25_2: C25.2 JO19.1 R11.2 U5.10 | length 252.1
  Top Layer w6: JO19.1 C25.2 ; U5.10 346.24,-2571.38 C25.2 ; R11.2 C25.2
NetC26_2: C26.2 JO20.1 R12.2 U6.10 | length 262.7
  Top Layer w6: JO20.1 601.62,-2824 C26.2 ; U6.10 653.74,-2883.88 C26.2 ; R12.2 C26.2
NetC31_2: C31.2 JO25.2 R13.1 U7.1 | length 275.6
  Top Layer w6: R13.1 C31.2 ; U7.1 190,-3581.89 C31.2 ; JO25.2 214,-3536 C31.2
NetC32_2: C32.2 JO26.2 R14.1 U8.1 | length 290.9
  Top Layer w6: R14.1 C32.2 ; U8.1@468.13,-3880.63 U8.1 490,-3861.89 C32.2 ; JO26.2@571.25,-3750 JO26.2 516.25,-3805 C32.2
NetC33_2: C33.2 JO25.1 R15.2 U7.10 | length 293
  Top Layer w6: JO25.1 338,-3536 328.74,-3545.26 U7.10 ; C33.2 394,-3560 R15.2
NetC34_2: C34.2 JO26.1 R16.2 U8.10 | length 263.6
  Top Layer w6: JO26.1 748.5,-3805 R16.2@752.5,-3801 ; U8.10 670,-3839.37 C34.2@670,-3816
VIN1: CON3.1 U1.7 | length 737.6
  Top Layer w6: U1.7@315.32,-1279.68 U1.7@340,-1279.68 ; U1.7 U1.7@340,-1279.68 ; CON3.1 416.47,-973.07 381.34,-1008.2 266.34,-1008.2 238.84,-1035.7 238.84,-1088.2 261.63,-1111 316.63,-1111 337.5,-1131.87 337.5,-1157.5 277.5,-1217.5 277.5,-1250 307.18,-1279.68 U1.7@340,-1279.68
VIN2: CON3.3 U2.7 | length 1105.2
  Top Layer w6: CON3.3 614.96,-894.33 794,-1073.37 794,-1496.57 793.84,-1496.73 793.84,-1613.43 794,-1613.59 794,-1631.41 779.87,-1645.54 728.67,-1645.54 708.84,-1625.7 708.84,-1575.7 697.82,-1564.68 U2.7
VIN3: CON3.5 U3.7 | length 1549.8
  Top Layer w6: U3.7@351.56,-1845 U3.7 392.82,-1842.18 441.34,-1890.7 576.34,-1890.7 806,-1661.04 806,-1068.4 553.19,-815.59 CON3.5
VIN4: CON3.7 U4.7 | length 1992.3
  Top Layer w6: CON3.7 535.64,-736.85 818,-1019.21 818,-2379.04 788.84,-2408.2 713.84,-2408.2 662.82,-2357.18 U4.7
VIN5: CON3.9 U5.7 | length 2512
  Top Layer w6: U5.7 397.82,-2689.68 408.84,-2700.7 408.84,-2723.2 423.84,-2738.2 481.34,-2738.2 633.84,-2585.7 v1(633.84,-2453.2) ; CON3.9 596.43,-658.11 v1(606.34,-648.2)
  SIGNAL1 w6: v1(606.34,-648.2) v1@611.34,-653.2
  SIGNAL2 w6: v1(606.34,-648.2) 744.34,-786.2 744.34,-1130.79 719,-1156.12 719,-1446.07 704,-1461.07 704,-2383.04 v1(633.84,-2453.2)
VIN6: CON3.11 U6.7 | length 2852.3
  Top Layer w6: CON3.11 582.67,-579.37 598.84,-563.2 v1(598.84,-548.2) ; v1(611.34,-3060.7) 591.34,-3040.7 591.34,-3025.7 609.85,-3007.18 U6.7
  SIGNAL2 w6: v1(598.84,-548.2) 756.34,-705.7 756.34,-1135.76 731,-1161.09 731,-1451.04 716,-1466.04 716,-2609.24 716.34,-2609.58 716.34,-2895.7 598.84,-3013.2 598.84,-3048.2 v1(611.34,-3060.7)
VIN7: CON3.13 U7.7 | length 3623.6
  Top Layer w6: U7.7 332.93,-3663.87 365.08,-3663.87 374.16,-3672.95 374.16,-3696.02 v1(388.84,-3710.7) ; v1(446.34,-510.7) 463.84,-510.7 473.91,-500.63 CON3.13
  SIGNAL2 w6: v1(388.84,-3710.7) 388.84,-3693.2 463.44,-3618.59 463.5,-3618.59 583.5,-3498.59 583.5,-2166.09 598.84,-2150.76 598.84,-1494.34 576,-1471.5 576,-1021.04 681.34,-915.7 681.34,-785.7 446.34,-550.7 v1(446.34,-510.7)
  POWER w6: v1(388.84,-3710.7) v1@391.34,-3708.2
VIN8: CON3.15 U8.7 | length 4008.4
  Top Layer w6: v1(446.58,-468.83) 448.21,-468.83 495.15,-421.89 CON3.15 ; v1(558.84,-3938.2) 625.85,-3938.2 626.56,-3937.5 U8.7
  SIGNAL2 w6: v1(446.58,-468.83) 421.34,-494.07 421.34,-570.7 541.34,-690.7 541.34,-880.7 ; 541.34,-870.7 541.34,-3465.7 291.34,-3715.7 291.34,-3808.2 421.34,-3938.2 v1(558.84,-3938.2)
WR: CON3.22 U1.6 U2.6 U3.6 U4.6 U5.6 U6.6 U7.6 U8.6 | length 6593.9
  Top Layer w6: v1(248.84,-148.2) 248.84,-155.7 278.8,-185.67 CON3.22 ; v1(251.34,-1238.2) 251.34,-1240.81 309.9,-1299.37 ; v1(298.84,-2728.2) 327.41,-2728.2 U5.6 ; v1(333.84,-3710.7) 333.84,-3684.47 U7.6 256.34,-3751.77 256.34,-3950.7 301.34,-3995.7 592.41,-3995.7 U8.6 ; v1(343.84,-1885.7) U3.6@343.84,-1866.77 ; U1.6 U1.6@352.28,-1299.37 ; U4.6 623.74,-2398.11 v1(623.84,-2398.2) ; U6.6@650,-3030.61 U6.6 658.84,-3031.97 v1(658.84,-3050.7) ; v1(651.34,-1638.2) 651.34,-1586.77 U2.6
  SIGNAL2 w6: v1(248.84,-148.2) 148.84,-248.2 148.84,-1083.2 251.34,-1185.7 v1(251.34,-1238.2) 251.34,-1310.7 126.34,-1435.7 126.34,-1678.2 333.84,-1885.7 v1(343.84,-1885.7) 106.5,-2123.04 106.5,-2486.57 106.34,-2486.73 106.34,-2535.7 v1(298.84,-2728.2)
  Bottom Layer w6: v1(333.84,-3710.7) 333.84,-3688.2 256.34,-3610.7 256.34,-3190.7 346.34,-3100.7 ; v1(343.84,-1885.7) 453.84,-1775.7 661.34,-1775.7 696.34,-1740.7 696.34,-1683.2 v1(651.34,-1638.2) ; v1(623.84,-2398.2) 511.34,-2398.2 298.84,-2610.7 v1(298.84,-2728.2) 278.84,-2748.2 278.84,-3033.2 346.34,-3100.7 ; v1(658.84,-3050.7) 601.34,-3108.2 353.84,-3108.2 346.34,-3100.7
pads on no net: CON3.0

## Polygon pours and split planes (outlines as drawn)
+10V on POWER "+10V@PWR" (solid, pour order 1012): 427.5,-1290 802.5,-1290 802.5,-4002.5 477.5,-4002.5 475,-3835 350,-3835 350,-3572.5 507.01,-3572.5 504.93,-2980 370,-2980 370,-2585 540,-2585 540,-1905 402.5,-1905 402.5,-1740 405,-1737.5 482.5,-1737.5 482.5,-1410 420,-1410 420,-1287.5
+10V on POWER "+10V@PWR" (solid, pour order 1008): 497.5,-1290 427.5,-1290 427.5,-1355 427.5,-1372.5 497.5,-1372.5 497.5,-1290
+10V on POWER "+10V@PWR" (solid, pour order 1007): 530,-1812.5 460,-1812.5 460,-1877.5 460,-1895 530,-1895 530,-1812.5
+10V on POWER "+10V@PWR" (solid, pour order 1006): 800,-2335 730,-2335 730,-2400 730,-2417.5 800,-2417.5 800,-2335
+10V on POWER "+10V@PWR" (solid, pour order 1005): 427.5,-3600 357.5,-3600 357.5,-3665 357.5,-3682.5 427.5,-3682.5 427.5,-3600
+10V on POWER "+10V@PWR" (solid, pour order 1004): 800,-3910 730,-3910 730,-3975 730,-3992.5 800,-3992.5 800,-3910
+10V on POWER "+10V@PWR" (solid, pour order 1002): 802.5,-2970 732.5,-2970 732.5,-3035 732.5,-3052.5 802.5,-3052.5 802.5,-2970
+10V on POWER "+10V@PWR" (solid, pour order 1001): 504.72,-2654.93 434.72,-2654.93 434.72,-2719.93 434.72,-2737.43 504.72,-2737.43 504.72,-2654.93
+10V on POWER "+10V@PWR" (solid, pour order 1000): 800,-1575 730,-1575 730,-1640 730,-1657.5 800,-1657.5 800,-1575
+10V on POWER "+10V@TOP" (solid, pour order 1010): 414.4,-23.2 802.5,-23.2 802.5,-1295.63 420.7,-1295.63
-10V on POWER "-10V@PWR" (solid, pour order 1009): 403.2,-20.21 49.08,-22.69 47.5,-3990.7 401.04,-3990.7
+10V on Top Layer "+10V@TOP" (solid, pour order 1014): 617.35,-227.38 788.84,-227.38 788.84,-469.02 785.83,-472.38 611.34,-472.38 611.34,-234.09 617.35,-227.38
-10V on Top Layer "-10V@TOP" (solid, pour order 1013): 20.45,-282.58 212.95,-282.58 212.95,-512.58 212.95,-592.58 80.45,-592.58 27.95,-592.58 25.45,-590.08 20.45,-585.08 20.45,-282.58
GND on Top Layer "GND@TOP" (solid, pour order 1000): 426.34,-313.2 426.3,-313.23 248.41,-313.23 237.39,-324.25 246.34,-333.2 246.34,-1003.2 396.34,-1003.2 438.84,-960.7 436.34,-958.2 436.34,-313.2
-10VIN on Top Layer "-10VIN" (solid, pour order 1001): 1.34,-100.7 206.34,-100.7 221.34,-115.7 221.34,-225.7 446.34,-225.7 448.84,-228.2 453.84,-233.2 453.84,-295.7 3.84,-295.7 1.34,-293.2 1.34,-100.7
+10VIN on Top Layer "+10VIN" (solid, pour order 1002): 476.34,-215.7 476.34,-320.7 607.34,-320.7 611.34,-324.7 611.34,-278.17 720.86,-278.17 731.34,-267.7 788.84,-210.2 788.84,-85.7 601.34,-85.7 601.34,-213.2 478.84,-213.2 476.34,-215.7
-10V on POWER "-10V@PWR" (solid, shelved, pour order 1011): 352.5,-1287.5 47.5,-1287.5 47.5,-4002.5 465,-4002.5 465,-3857.5 462.5,-3855 290,-3855 290,-3532.5 452.5,-3532.5 452.5,-2992.5 345,-2992.5 345,-2540 470,-2540 472.5,-2542.5 475,-2540 475,-2210 307.5,-2210 307.5,-1705 442.5,-1705 442.5,-1465 302.5,-1465 302.5,-1375 352.5,-1375
GND on Bottom Layer "GND@BOT" (solid, pour order 1003): 428.84,-65.7 713.84,-65.7 716.34,-68.2 716.34,-323.2 716.34,-1773.2 713.84,-1775.7 431.34,-1775.7 431.34,-68.2 428.84,-65.7
GND on GND (split plane): 829.9,-3979.9 20.1,-3979.9 20.1,-20.1 829.9,-20.1

## Silkscreen, mask and mechanical layers (free items; w line width, h text height)
Top Overlay:
  drawing of 2858 lines, arcs and shapes, not listed
  text "HammerHeadAFE" at 827.5,-1072.5 h100 r90
Mechanical 4:
  text "H.Herman" at -1558.66,-4745.7 h200
  text "NESL UCLA" at 1836.34,-4895.7 h400
  text "HammerHeadAFE" at 1411.34,-5790.7 h400
  text "H.Herman" at -1621.16,-6283.2 h200
  text "A" at 791.34,-6588.2 h200
  text "201209002" at 3013.84,-6590.7 h400
  text "1:1" at 1236.34,-6910.7 h200
Mechanical 5:
  lines w5: -4891.16,-3123.2 -4641.16,-3123.2 ; 478.84,-7243.2 478.84,-6993.2 ; 478.84,996.8 478.84,746.8 ; 5848.84,-3123.2 5598.84,-3123.2 ; -4641.16,-3123.2 -4791.16,-3036.6 -4791.16,-3209.8 -4641.16,-3123.2 ; 478.84,-6993.2 392.23,-7143.2 565.44,-7143.2 478.84,-6993.2 ; 478.84,746.8 392.23,896.8 565.44,896.8 478.84,746.8 ; 5598.84,-3123.2 5748.84,-3036.6 5748.84,-3209.8 5598.84,-3123.2 ; -4641.16,-6993.2 -4641.16,746.8 5598.84,746.8 5598.84,-6993.2 -4641.16,-6993.2
  text "2" at -2307.55,786.8 h120
  text "1" at 3201.76,786.8 h120
  text "B" at -4777.79,-1058.2 h120
  text "B" at 5662.21,-1058.2 h120
  text "A" at -4792.21,-5308.2 h120
  text "A" at 5647.79,-5308.2 h120
  text "2" at -2307.55,-7153.2 h120
  text "1" at 3201.76,-7153.2 h120
Mechanical 6:
  lines w5: -2151.16,-6743.2 598.84,-6743.2 5598.84,-6743.2 ; -2151.16,-6368.2 598.84,-6368.2 ; -2151.16,-5993.2 598.84,-5993.2 ; -2151.16,-5618.2 598.84,-5618.2 ; -2151.16,-5243.2 598.84,-5243.2 ; -2151.16,-4868.2 598.84,-4868.2 ; -401.16,-6993.2 -401.16,-4493.2 ; 598.84,-6993.2 598.84,-4493.2 ; 598.84,-6243.2 5598.84,-6243.2 ; 598.84,-5113.2 5598.84,-5113.2 ; 1098.84,-6743.2 1098.84,-6243.2 ; 1718.84,-6993.2 1718.84,-6743.2 ; 2098.84,-6743.2 2098.84,-6243.2 ; 3598.84,-6993.2 3598.84,-6743.2 ; 5098.84,-6743.2 5098.84,-6243.2 ; -2151.16,-6993.2 -2151.16,-4493.2 5598.84,-4493.2 5598.84,-6993.2 -2151.16,-6993.2
  text "DRAWN" at -2121.16,-4623.2 h100
  text "CHECKED" at -2121.16,-4998.2 h100
  text "TITLE" at 628.84,-5243.2 h100
  text "QA" at -2121.16,-5373.2 h100
  text "MFG" at -2121.16,-5748.2 h100
  text "APPROVED" at -2121.16,-6123.2 h100
  text "SIZE" at 707.84,-6373.2 h100
  text "DWG NO" at 2128.84,-6373.2 h100
  text "REV" at 5226.27,-6373.2 h100
  text "SCALE" at 628.84,-6873.2 h100
Mechanical 7:
  circle w5: c425,-3375 r62.5
  circle w5: c425,-2000 r62.5
  lines w5: 346.26,-1002.76 346.26,-50 503.74,-50 503.74,-1002.76 346.26,-1002.76
Mechanical 8:
  the board outline again, w5

## Dimensions
0,0 to 850,0 on Mechanical 4
0,0 to 0,-4000 on Mechanical 4
425,-2000 to 850,0 on Mechanical 4
425,-2000 to 425,-3375 on Mechanical 4

## Text inside footprints (layer, text, board x,y; h text height)
C3: Top Overlay "+" at 641.34,-380.7 h30 r270
C4: Top Overlay "+" at 761.34,-180.7 h30 r90
C7: Top Overlay "+" at 161.34,-540.7 h30 r90
C8: Top Overlay "+" at 41.34,-16 h30 r270